# Altium PCB PCB_Ticketing_Master.PcbDoc
Units mm, origin at the board's own origin, x right, y up, seen from the top; angles counter-clockwise.
Board outline 167.28 x 106.75 mm, 2 copper layers (Top Layer, Bottom Layer), stack 1.586 mm thick; 76 components, 54 nets, 318 pads, 135 vias.
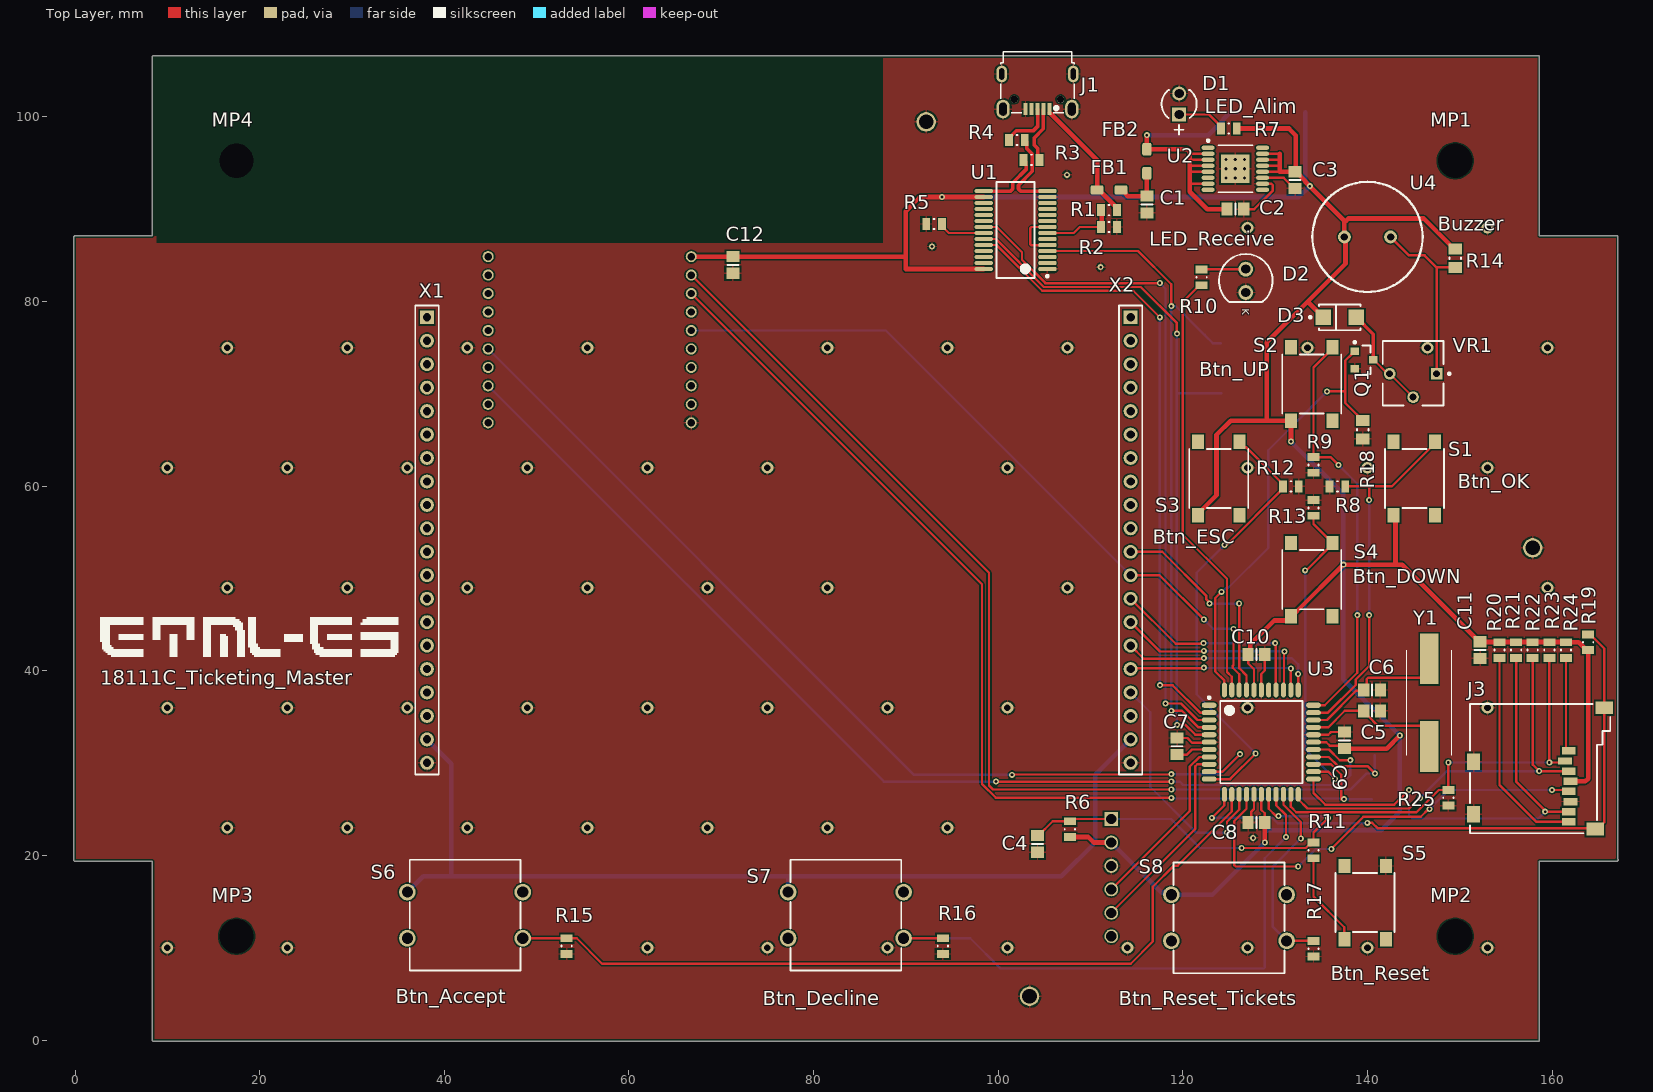
[diagram p0: Top Layer view]
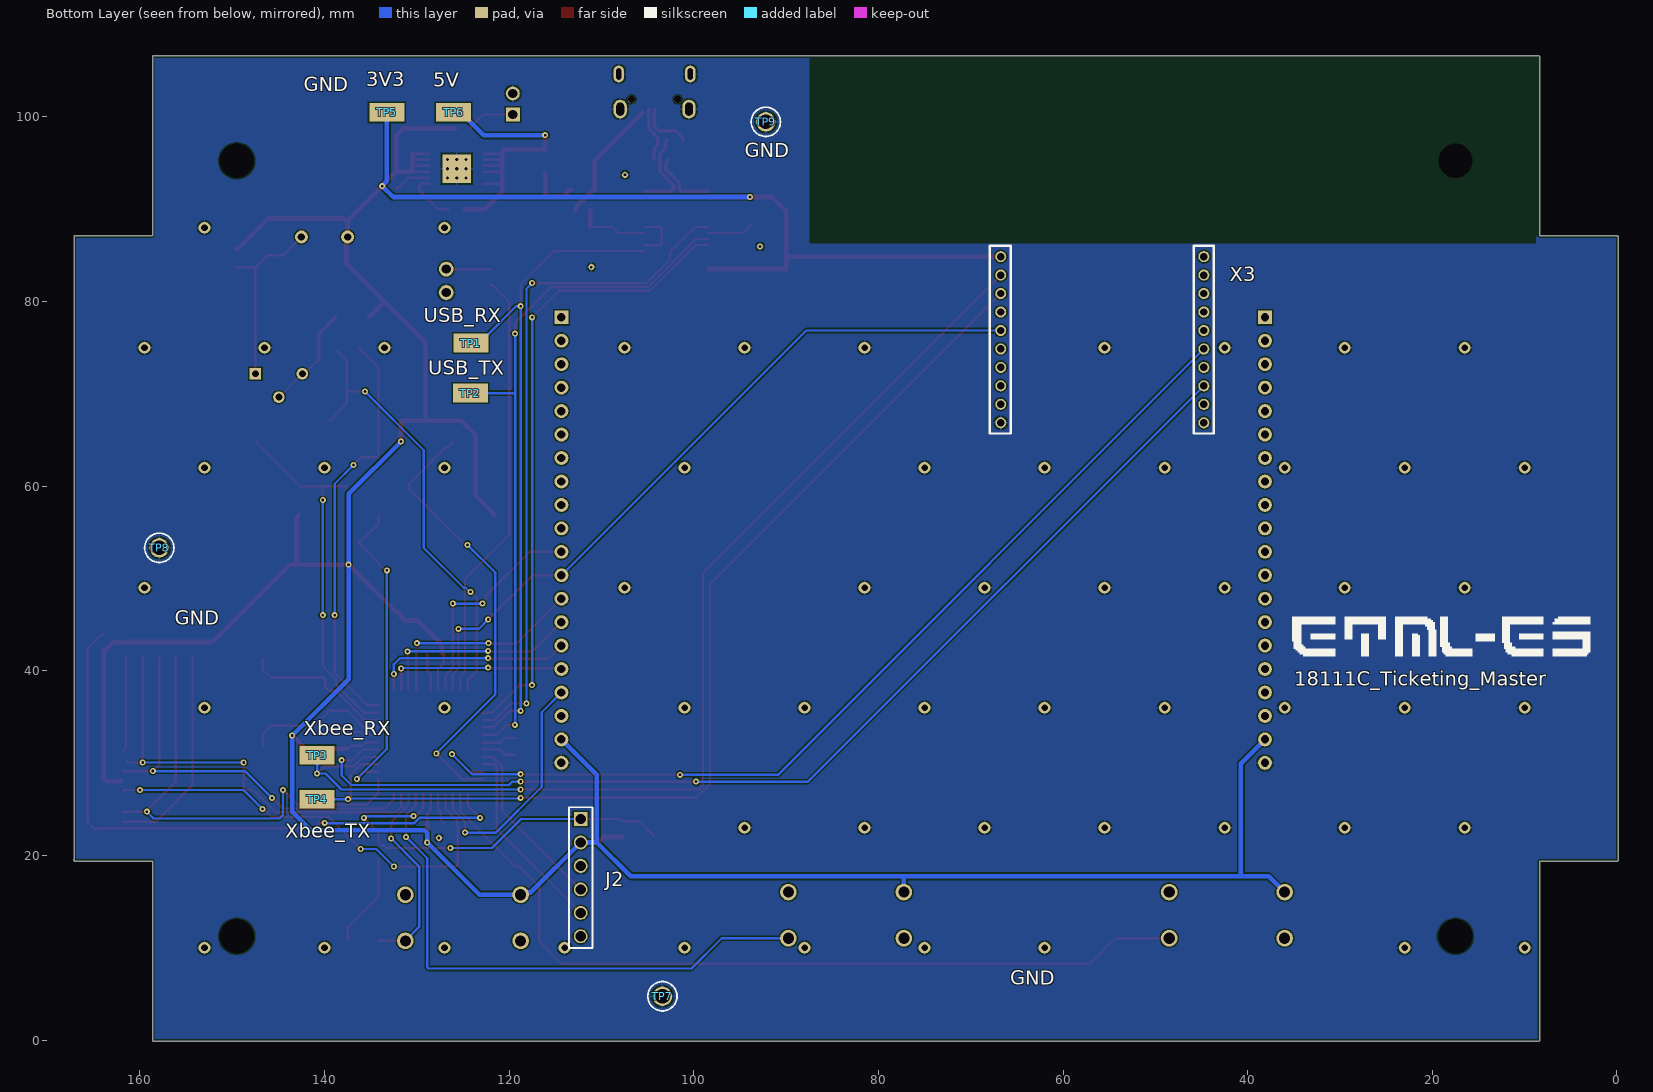
[diagram p1: Bottom Layer view, seen from below]

## Layer stack, top to bottom
Top Solder: solder mask 0.0102, Solder Resist, Dk 3.5
Top Layer: signal copper 0.018
Dielectric1: core 1.55, FR-4, Dk 4.8
Bottom Layer: signal copper 0.018
Bottom Solder: solder mask 0.0102, Solder Resist, Dk 3.5

## Board outline
8.373,0 8.373,19.373 0,19.373 cw(c0,19.5) -0.127,19.5 -0.127,87 cw(c0,87) 0,87.127 8.373,87.127 8.373,106.5 cw(c8.5,106.5) 8.5,106.627 158.5,106.627 cw(c158.5,106.5) 158.627,106.5 158.627,87.127 167,87.127 cw(c167,87) 167.127,87 167.127,19.601 cw(c167.025,19.525) 167.152,19.525 cw(c167.025,19.525) 167.115,19.435 167.09,19.41 cw(c167,19.5) 167,19.373 158.627,19.373 158.627,0 cw(c158.5,0) 158.5,-0.127 8.5,-0.127 cw(c8.5,0)

## Design rules (kind name [scope] priority, off if disabled: settings)
BoardOutlineClearance [All] p1: gap=0.25 ignorepadtopadclearanceinfootprint=FALSE except(0: Arc-SplitContinuation Track-SplitContinuation SMDPad-SplitContinuation THPad-SplitContinuation Via-SplitContinuation Fill-SplitContinuation Poly-SplitContinuation Region-SplitContinuation Text-SplitContinuation)
Clearance Clearance-xPP-xTP-xTT [All] p1: gap=0.15 ignorepadtopadclearanceinfootprint=FALSE except(0: Arc-Hole Track-Hole SMDPad-Hole THPad-Hole Via-Hole Fill-Hole Poly-Hole Region-Hole Text-Hole)
ComponentClearance [All] p1: gap=0.25 collisioncheckmode=3 verticalgap=0.25 showdistances=FALSE
DiffPairsRouting [All] p1: maxlimit=0.25 minlimit=0.25 mostfreqgap=0.25 toplayer_minwidth=0.381 toplayer_maxwidth=0.381 toplayer_prefwidth=0.381 bottomlayer_minwidth=0.381 bottomlayer_maxwidth=0.381 bottomlayer_prefwidth=0.381 maxuncoupledlength=12.5
Height [All] p1: minheight=0 maxheight=25 prefheight=12.5
HoleSize HoleSize-PTH [All] p1: absolutevalues=TRUE maxlimit=10 minlimit=0.25 maxpercent=80.000 minpercent=20.000
HoleToHoleClearance [All] p1: gap=0.35 allowstackedmicrovias=TRUE
MinimumAnnularRing "Minimum IAR  >0.45mm" [((ObjectKind = 'Pad') OR (ObjectKind = 'Via')) And (Layer = 'MultiLayer') And (HoleDiameter > AsMM(0.45))] p1: minimumring=0.175 // minimum inner annular ring for pads > 0.45mm finished hole size
MinimumAnnularRing "Minimum IAR <=0.45mm" [((ObjectKind = 'Pad') OR (ObjectKind = 'Via')) And (Layer = 'MultiLayer') And (HoleDiameter <= AsMM(0.45))] p2: minimumring=0.175 // minimum inner annular ring for pads <= 0.45mm finished hole size
MinimumSolderMaskSliver [All] p1: minsoldermaskwidth=0.08
PasteMaskExpansion [All] p1: expansion=-0.025
PlaneClearance PlaneClearance-IPI [All] p1: clearance=0.25
PlaneConnect [All] p1: planeconnectstyle=Relief reliefexpansion=0.175 reliefentries=4 reliefconductorwidth=0.2 reliefairgap=0.2
PolygonConnect PolygonConnect-xTW [All] p1: connectstyle=Relief reliefconductorwidth=0.2 reliefentries=4 polygonreliefangle="90 Angle" airgapwidth=0.2
RoutingCorners [All] p1: cornerstyle=45-Degree minsetback=2.5 maxsetback=2.5
RoutingVias RoutingViasES [All] p1: holewidth=0.3 width=0.65 viastyle="Through Hole" minholewidth=0.25 minwidth=0.61 maxholewidth=0.45 maxwidth=0.8 // finishet hole size <= 0.45mm
SilkToSilkClearance [All] p1: silktosilkclearance=0.2
SilkToSolderMaskClearance SilkscreenOverComponentPads [IsPad] p1: minsilkscreentomaskgap=0.2 clearancetoexposedcopper=TRUE
SolderMaskExpansion [All] p1: expansion=0 istentingtop=FALSE
UnRoutedNet [All] p1: checkbadconnections=TRUE
Width "Width Power" [InNetClass('POWER')] p1: maxlimit=1 minlimit=0.254 preferedwidth=0.5
Width Width-xTW [All] p2: maxlimit=1.5 minlimit=0.15 preferedwidth=0.2
17 further rules are at their usual default settings.

## Classes and differential pairs
net class POWER: 3V3 5V GND NetC1_1 NetR1_2 NetU2_6 VBUS
component class Designator: 1 2 3 4 D1 D2 D3 MP1 MP2 MP3 MP4 Q1 R7 R8 R9 R10 R12 R13 R14 R15 R16 R17 R18 S1 S2 S3 S4 S6 S7 S8 U4 VR1
differential pair USB_D: +USB_D_P -USB_D_N
differential pair U_D: +U_D_P -U_D_N

## Components (designator, comment, footprint, x,y, rotation, side; value= is the part's Value field where it differs from the comment)
C1 "680nF" 6-0805_N 116.1,90.516 r270 top
C2 "10uF" 6-0805_N 125.695,90.009 r0 top
C3 "10uF" 6-0805_N 132.164,93.159 r90 top
C4 "120nF" 6-0805_N 104.25,21.25 r90 top
C5 "22pF" 6-0805_N 140.5,35.669 r180 top
C6 "22pF" 6-0805_N 140.5,37.925 r180 top
C7 "10uF" 6-0805_N 119.387,31.825 r270 top
C8 "100nF" 6-0805_N 127.975,23.55 r0 top
C9 "100nF" 6-0805_N 137.491,32.469 r270 top
C10 "100nF" 6-0805_N 127.975,41.75 r180 top
C11 "1uF" 6-0805_N 152.2,42.25 r90 top
C12 "100nF" 6-0805_N 71.25,83.97 r90 top
D1 "WP424IDT" LED-2P-2.28-3MM 119.6,101.4 r90 top
D2 "WP7113SEC" "Type 5mm" 126.821,82.245 r270 top
D3 "SS14-E3/61T" FP-95400-MFG 137.005,78.295 r0 top
FB1 "600Ohm, 2A" "WE-CBF_0805_High Current" 112,92.1 r0 top
FB2 "600Ohm, 2A" "WE-CBF_0805_High Current" 116.1,95.2 r90 top
J1 "629105150521" 629105150521 104.25,103.75 r180 top
J2 "76384-406LF" 76384-406LF 112.25,23.948 r270 bottom
J3 "693071010811" 693071010811 158.7,29.4 r90 top
MP1 "M3" 9774010151 149.5,95.25 r0 top locked
MP2 "M3" 9774010151 149.5,11.25 r0 top locked
MP3 "M3" 9774010151 17.5,11.25 r0 top locked
MP4 "M3" 9774010151 17.5,95.25 r0 top locked
Q1 "IRLML2402TRPBF" INTR-IRLML2402TRPBF-3_V 139.63,73.689 r0 top
R1 "10k" RESC0805(2012)_L 112,89.9 r180 top
R2 "20k" RESC0805(2012)_L 112,88.075 r0 top
R3 "24R" RESC0805(2012)_L 103.607,95.359 r180 top
R4 "24R" RESC0805(2012)_L 102.033,97.5 r0 top
R5 "1k" RESC0805(2012)_L 93.05,88.4 r180 top
R6 "47k" RESC0805(2012)_L 107.75,22.85 r90 top
R7 "68" RESC0805(2012)_L 124.984,98.75 r0 top
R8 "10k" RESC0805(2012)_L 136.75,59.985 r180 top
R9 "10k" RESC0805(2012)_L 134.161,62.305 r270 top
R10 "68" RESC0805(2012)_L 122.034,82.625 r270 top
R11 "120" RESC0805(2012)_L 134.15,20.558 r90 top value=10k
R12 "10k" RESC0805(2012)_L 131.711,59.985 r0 top
R13 "10k" RESC0805(2012)_L 134.161,57.645 r90 top
R14 "1k" RESC2013X60X35ML10T20 149.5,84.7 r90 top
R15 "10k" RESC0805(2012)_L 53.25,10.185 r270 top
R16 "10k" RESC0805(2012)_L 94,10.185 r270 top
R17 "10k" RESC0805(2012)_L 134.15,9.9 r270 top
R18 "100k" RESC2013X60X35ML10T20 139.5,66.125 r90 top
R19 "10k" RESC0805(2012)_L 163.9,43.1 r270 top
R20 "10k" RESC0805(2012)_L 154.299,42.25 r90 top
R21 "10k" RESC0805(2012)_L 156.099,42.25 r90 top
R22 "10k" RESC0805(2012)_L 157.899,42.25 r90 top
R23 "10k" RESC0805(2012)_L 159.7,42.25 r90 top
R24 "10k" RESC0805(2012)_L 161.5,42.25 r90 top
R25 "1M" RESC0805(2012)_L 148.75,26.25 r90 top
S1 "430152095826" 430152095826 145.091,60.845 r90 top
S2 "430152095826" 430152095826 133.961,71.075 r90 top
S3 "430152095826" 430152095826 123.891,60.845 r90 top
S4 "430152095826" 430152095826 133.961,49.875 r90 top
S5 "430182050816" 430182050816 139.741,14.893 r270 top
S6 "430466073726" 4304x60737x6_12x12x7.3 42.251,13.535 r0 top
S7 "430466073726" 4304x60737x6_12x12x7.3 83.501,13.535 r0 top
S8 "430466073726" 4304x60737x6_12x12x7.3 125.001,13.25 r0 top
TP1 "" KSTN-5019_V 124.134,75.5 r180 bottom
TP2 "" KSTN-5019_V 124.195,70.086 r180 bottom
TP3 "" KSTN-5019_V 140.8,30.869 r180 bottom
TP4 "" KSTN-5019_V 140.8,26.1 r180 bottom
TP5 "" KSTN-5019_V 133.25,100.5 r180 bottom
TP6 "" KSTN-5019_V 126.021,100.5 r180 bottom
TP7 "" KSTN-5011_V 103.4,4.75 r180 bottom
TP8 "" KSTN-5011_V 157.899,53.324 r270 bottom
TP9 "" KSTN-5011_V 92.2,99.469 r180 bottom
U1 "CY7C64225-28PVXC" CYP-PVX28_N 101.883,87.75 r180 top
U2 "MAX1793EUE33+" TSOP65P640X110_HS-17N 125.684,94.384 r0 top
U3 "PIC32MX170F256D" MCHP-TQFP-PT44_N 128.5,32.275 r0 top
U4 "PS1240P02BT" Buzzer 140,87 r0 top
VR1 "0-10k" BOUR-3362P 144.948,72.219 r180 top
X1 "HEADER-1X20ROUND" HDR1X20 38.131,78.295 r270 top
X2 "HEADER-1X20ROUND" HDR1X20 114.341,78.295 r270 top
X3 "Header 2x10" ZB-SB 55.75,75.87 r180 bottom
Y1 "LFXTAL003151" LFXTAL003151REEL 146.691,36.55 r90 top

## Footprints (in the part's own frame and the unit in brackets; to place one, negate y for a bottom-side part, rotate by r counter-clockwise, add the part's x,y. Pads: shape width x height; smd on the part's side, far side on the other; paste and mask are expansions set on the pad)
6-0805_N [mm] "Chip Resistor, Body 2.0x1.2mm, IPC Medium Density"
  rect 1.2x1.4 smd: 1(-0.9,0) 2(0.9,0)
  silkscreen extent 0,-0.6 0,0.6, body extent -1.07,-0.7 1.07,0.7, height 0.7
4304x60737x6_12x12x7.3 [mm] "12x12mm washable Tact Switch, THT version"
  round 1.8 hole 1.2: 1(-6.25,2.5) 2(6.25,2.5) 3(-6.25,-2.5) 4(6.25,-2.5)
  silkscreen extent -6,-6 6,6, body extent -6.99,-6 6.99,6, height 7.35
76384-406LF [mm] "Connector; Header; 6 Position"
  rect 1.5x1.5 hole 1.1: 1(0,0)
  round 1.5 hole 1.1: 2(2.54,0) 3(5.08,0) 4(7.62,0) 5(10.16,0) 6(12.7,0)
  silkscreen extent -1.27,-1.27 13.97,1.27, body extent -0.72,-2.58 13.52,2.67, height 8.84
9774010151 [mm] "M2.5 Thread Internal, Length 1mm"
  round 0 hole 3.7 unplated paste-403.566: 1(0,0)
430152095826 [mm] "SMD Tact Switch, body 6x6mm"
  rect 1.55x1.3 smd: 1(-3.975,2.25) 2(-3.975,-2.25) 3(3.975,2.25) 4(3.975,-2.25)
  silkscreen extent -3.2,-3.2 3.2,3.2, body extent -4.5,-3.1 4.5,3.1, height 9.53
430182050816 [mm] "SMD Tact Switch, body 6x6mm"
  rect 1.55x1.3 smd: 1(-3.975,2.25) 2(-3.975,-2.25) 3(3.975,2.25) 4(3.975,-2.25)
  silkscreen extent -3.2,-3.2 3.2,3.2, body extent -4.5,-3.1 4.5,3.1, height 5.03
629105150521 [mm] "Micro USB 2.0 SMT Type B Horizontal 5 Contacts High Current"
  rect 0.45x1.3 smd: 1(-1.3,2.9) 2(-0.65,2.9) 3(0,2.9) 4(0.65,2.9) 5(1.3,2.9)
  oval 1.15x1.8 hole 0.55 slot 1.2 at 90 deg: Shell(-3.875,-0.9) Shell(3.875,-0.9)
  oval 1.45x2 hole 0.85 slot 1.4 at 90 deg: Shell(-3.725,2.9) Shell(3.725,2.9)
  round 0.8 hole 0.8 unplated: ""(-2.5,1.85) ""(2.5,1.85)
  silkscreen extent -4,-3.3 4,3.3, body extent -4,-3.3 4,3.3, height 2.71
693071010811 [mm] "Micro SD Card Connector, Push & Push"
  rect 0.8x1.5 smd: 1(1.94,-3.1) 2(0.84,-2.7) 3(-0.26,-3.1) 4(-1.36,-3.3) 5(-2.46,-3.1) 6(-3.56,-3.3) 7(-4.66,-3.1) 8(-5.76,-3.1)
  rect 1.4x1.9 smd: 9(-6.55,-5.95) 9(6.6,-6.95)
  rect 1.8x1.4 smd: 10(-4.95,7.2) 10(0.75,7.2)
  silkscreen extent -7,-7.6 7,7.6, body extent -7,-7.61 7,7.6, height 1.85
BOUR-3362P [mm] "THD, 3-Leads, Body 6.6x6.99mm, Pitch 2.54mm"
  rect 1.25x1.25 hole 0.75: 1(-2.54,0.035)
  round 1.25 hole 0.75: 2(0,2.575) 3(2.54,0.035)
  silkscreen extent -4.03,-3.49 3.3,3.5, body extent -3.3,-3.49 3.3,3.49, height 4.95
Buzzer [mm] "Buzzer d_12mm"
  round 1.4 hole 0.8: 1(-2.5,0) 2(2.5,0)
  silkscreen extent -5.97,-5.97 5.97,5.97, body extent -5.97,-5.71 5.97,5.71, height 6.5
CYP-PVX28_N [mm] "SOP, 28-Leads, Body 10.2x5.3mm, Pitch 0.65mm, IPC Medium Density"
  oval 2x0.45 smd: 1(-3.45,4.225) 2(-3.45,3.575) 3(-3.45,2.925) 4(-3.45,2.275) 5(-3.45,1.625) 6(-3.45,0.975) 7(-3.45,0.325) 8(-3.45,-0.325) 9(-3.45,-0.975) 10(-3.45,-1.625) 11(-3.45,-2.275) 12(-3.45,-2.925) 13(-3.45,-3.575) 14(-3.45,-4.225) 15(3.45,-4.225) 16(3.45,-3.575) 17(3.45,-2.925) 18(3.45,-2.275) 19(3.45,-1.625) 20(3.45,-0.975) 21(3.45,-0.325) 22(3.45,0.325) 23(3.45,0.975) 24(3.45,1.625) 25(3.45,2.275) 26(3.45,2.925) 27(3.45,3.575) 28(3.45,4.225)
  silkscreen extent -3.58,-5.2 2.05,5.2, body extent -3,-4.95 3,4.95, height 1.75
FP-95400-MFG [mm]
  rect 1.7x1.68 smd paste+0 mask+0: 1(-1.79,0) 2(1.79,0)
  silkscreen extent -3.32,-1.4 2.25,1.4, body extent -2.74,-1.5 2.74,1.5, height 0.25
HDR1X20 [mm] "Connector; Header; 20 Position"
  rect 1.5x1.5 hole 0.9: 1(0,0)
  round 1.5 hole 0.9: 2(2.54,0) 3(5.08,0) 4(7.62,0) 5(10.16,0) 6(12.7,0) 7(15.24,0) 8(17.78,0) 9(20.32,0) 10(22.86,0) 11(25.4,0) 12(27.94,0) 13(30.48,0) 14(33.02,0) 15(35.56,0) 16(38.1,0) 17(40.64,0) 18(43.18,0) 19(45.72,0) 20(48.26,0)
  silkscreen extent -1.27,-1.27 49.53,1.27
INTR-IRLML2402TRPBF-3_V [mm] "SOT23, 3-Leads, Body 3.05x1.4mm, Pitch 0.95mm"
  rect 0.9x0.8 smd: 1(-1,0.95) 2(-1,-0.95) 3(1,0)
  silkscreen extent -1.12,-1.55 0.7,2.02, body extent -0.7,-1.52 0.7,1.53, height 1.11
KSTN-5011_V [mm] "Test Point, Dia 3.17mm"
  round 2.1 hole 1.6: 1(0,0)
  silkscreen extent -1.59,-1.58 1.59,1.58, body extent -1.59,-1.59 1.59,1.59, height 8.13
KSTN-5019_V [mm] "Test Point, 1-Leads, Body 3.81x2.03mm"
  rect 3.8x2.03 smd: 1(0,0)
  body extent -1.91,-1.02 1.9,1.02, height 2.29
LED-2P-2.28-3MM [mm] "LED, 2-Leads, Dia 3mm, Pitch 2.28mm"
  rect 1.5x1.5 hole 1: 1(-1.14,0)
  round 1.5 hole 1: 2(1.14,0)
  silkscreen extent -3.29,-1.9 1.52,1.9, body extent -1.9,-1.91 1.52,1.91, height 5.3
LFXTAL003151REEL [mm]
  rect 5.5x2 smd: 1(-4.75,0) 2(4.75,0)
  silkscreen extent -5.7,-2.45 5.7,2.45, body extent -5.81,-2.35 5.8,2.35, height 4.2
MCHP-TQFP-PT44_N [mm] "QFN, 44-Leads, Body 10x10mm, Pitch 0.8mm, IPC Medium Density"
  oval 1.6x0.55 smd: 1(-5.65,4) 2(-5.65,3.2) 3(-5.65,2.4) 4(-5.65,1.6) 5(-5.65,0.8) 6(-5.65,0) 7(-5.65,-0.8) 8(-5.65,-1.6) 9(-5.65,-2.4) 10(-5.65,-3.2) 11(-5.65,-4) 23(5.65,-4) 24(5.65,-3.2) 25(5.65,-2.4) 26(5.65,-1.6) 27(5.65,-0.8) 28(5.65,0) 29(5.65,0.8) 30(5.65,1.6) 31(5.65,2.4) 32(5.65,3.2) 33(5.65,4)
  oval 0.55x1.6 smd: 12(-4,-5.65) 13(-3.2,-5.65) 14(-2.4,-5.65) 15(-1.6,-5.65) 16(-0.8,-5.65) 17(0,-5.65) 18(0.8,-5.65) 19(1.6,-5.65) 20(2.4,-5.65) 21(3.2,-5.65) 22(4,-5.65) 34(4,5.65) 35(3.2,5.65) 36(2.4,5.65) 37(1.6,5.65) 38(0.8,5.65) 39(0,5.65) 40(-0.8,5.65) 41(-1.6,5.65) 42(-2.4,5.65) 43(-3.2,5.65) 44(-4,5.65)
  silkscreen extent -5.77,-4.45 4.45,4.95, body extent -5,-5 5,5, height 1.2
RESC0805(2012)_L [mm] "Chip Resistor, Body 2.0x1.3mm, IPC High Density"
  rect 0.85x1.3 smd: 1(-0.85,0) 2(0.85,0)
  silkscreen extent -0.05,-0.55 0.05,0.55, body extent -1.1,-0.67 1.1,0.68, height 0.7
RESC2013X60X35ML10T20 [mm] "Chip Resistor, 2-Leads, Body 2.1x1.35mm, IPC Low Density"
  rect 1.2x1.45 smd: 1(-1,0) 2(1,0)
  silkscreen extent -0.1,-0.63 0.1,0.63, body extent -1.05,-0.68 1.05,0.67, height 0.6
TSOP65P640X110_HS-17N [mm] "TSOP, 16-Leads, Body 5.00x4.40mm, Pitch 0.65mm, Thermal Pad 3.10x3.10mm, IPC Medium Density"
  oval 1.4x0.45 smd: 1(-2.95,2.275) 2(-2.95,1.625) 3(-2.95,0.975) 4(-2.95,0.325) 5(-2.95,-0.325) 6(-2.95,-0.975) 7(-2.95,-1.625) 8(-2.95,-2.275) 9(2.95,-2.275) 10(2.95,-1.625) 11(2.95,-0.975) 12(2.95,-0.325) 13(2.95,0.325) 14(2.95,0.975) 15(2.95,1.625) 16(2.95,2.275)
  rect 3.1x3.1 smd: 17(0,0)
  rect 3.1x3.1 smd far side: 17(0,0)
  silkscreen extent -3.07,-2.55 1.85,3.17, body extent -3.19,-2.55 3.19,2.55, height 1.1
"Type 5mm" [mm] "THT, LED-5mm, 2pin- Body 5.8mm"
  round 1.6 hole 1: 1(1.27,0) 2(-1.27,0)
  silkscreen extent -2.9,-2.9 2.29,2.9, body extent -2.9,-2.9 2.5,2.9, height 11.7
"WE-CBF_0805_High Current" [mm]
  rrect40% 1.4x1 smd: 1(-1.3,0) 2(1.3,0)
  body extent -1,-0.6 1,0.6, height 0.9
ZB-SB [mm] "Header"
  round 1.2 hole 0.8: 1(-11,9) 2(-11,7) 3(-11,5) 4(-11,3) 5(-11,1) 6(-11,-1) 7(-11,-3) 8(-11,-5) 9(-11,-7) 10(-11,-9) 11(11,9) 12(11,7) 13(11,5) 14(11,3) 15(11,1) 16(11,-1) 17(11,-3) 18(11,-5) 19(11,-7) 20(11,-9)
  silkscreen extent -12.19,-10.16 12.07,10.16, body extent -12.55,-10.34 12.45,30.66, height 7.5

## Part data
C1: library part 885012207098, "WCAP-CSGP General Purpose Ceramic Capacitors, size 0805, 100nF, +/-10%, 50VDC", Supplier Part Number=732-7663-1-ND, Capacitance=680nF, Supplier=Digi-Key, Supplier Part Number 1=732-7663-1-ND, Supplier unit price=0.13, Technical Reference=X7R0805104K050DFCT10000
C2 C3 C7: library part Cap, "Capacitor", Supplier Part Number=1276-1298-1-ND, Supplier=Digi-Key, Supplier unit price=0.1
  C2 C3: Capacitance=10uF, LatestRevisionDate=17-Jul-2002, LatestRevisionNote="Re-released for DXP Platform.", PackageDescription="Radial Cap, Thru-Hole; 2 Leads; 0.3 in Pin Spacing", PackageReference=RAD-0.3, Published=8-Jun-2000, Publisher="Altium Limited"
C4: library part Cap, "Capacitor", Supplier Part Number=311-4323-1-ND, Supplier=Digi-Key, Supplier unit price=0.18
C5 C6: library part CMP-2007-03167-1, "VJ0805Y104KNAAT", Supplier Part Number=399-C0805C220J5GAC7800CT-ND, Supplier=Digi-Key, Supplier unit price=0.1
C8 C9 C10 C12: library part Cap, "Capacitor", Supplier Part Number=399-C0805C104M5RAC7800CT-ND, Supplier=Digi-Key, Supplier unit price=0.1
C11: library part Cap, "Capacitor", Supplier Part Number=1276-2931-1-ND, LatestRevisionDate=17-Jul-2002, LatestRevisionNote="Re-released for DXP Platform.", PackageDescription="Radial Cap, Thru-Hole; 2 Leads; 0.3 in Pin Spacing", PackageReference=RAD-0.3, Published=8-Jun-2000, Publisher="Altium Limited", Supplier=Digi-Key, Supplier unit price=0.1
D1: library part LED, "LED", Color=Red, Supplier Part Number=754-1305-ND, Supplier=Digi-Key, Supplier unit price=0.4
D2: library part LED, "LED", Color=Orange, Supplier Part Number=754-1271-ND, Supplier=Digi-Key, Supplier A Ref=754-1271-ND, Supplier unit price=0.4
D3: library part CMP-02539-000035-1, "DIODE SCHOTTKY 40V 1A DO214AC", Forward Current=1A, Manufacturer=Vishay, Max Junction Temp=+150°C, Max Repetitive Reverse Voltage=40V, Max Surge Forward Current=40A, Package=95400, Peak Reverse Current=0.2mA, Supplier Part Number=SS14-E3/61TGICT-ND, Temperature="-65°C to +150°C", Temperature Range Low=-65°C, Automotive=No, Category=Diode, ComponentLink2Description=Datasheet, ComponentLink2URL=http://www.vishay.com/docs/88746/ss12.pdf, Device Class L1="Discrete Semiconductors", Device Class L2=Diodes, Device Class L3="Schottky Diodes", Digikey Description="DIODE SCHOTTKY 40V 1A DO214AC", Footprint Url=http://www.vishay.com/docs/95400/sma.pdf, Height=2.29mm, Lead Free=Yes, Manufacturer Part Number=SS14-E3/61T, Mouser Description="SS14 Series 40 V 1 A Surface Mount Schottky Barrier Rectifier - DO-214AC (SMA)", Octopart=https://octopart.com/ss14-e3%2F61t-vishay-39552847, RoHS=TRUE, Standoff Height=0mm, Supplier=Digi-Key, Supplier unit price=0.48, Temperature Range High=+150°C
FB1 FB2: library part 742792040, "WE-CBF SMT EMI Suppression Ferrite Bead, size 0805, 600Ohm, 2A", DC Resistance max.=0.15Ohm, Operating Temperature="-55 to +125degC", Rated Current=2A, Supplier Part Number=732-1620-1-ND, ComponentLink1Description=Manufacturer, ComponentLink1URL=http://www.we-online.de, ComponentLink2Description=Datasheet, ComponentLink2URL=https://katalog.we-online.com/pbs/datasheet/742792040.pdf, Impedance max.=700Ohm, Impedance@100 MHz=600Ohm, Mounting Technology=SMT, Packaging="Tape and Reel", Part Number=742792040, Published Date="March 2019", Publisher="Wurth Elektronik", Size=0805, Supplier=Digi-Key, Supplier Part Number 1=732-1620-1-ND, Supplier unit price=0.22, Type="High Current"
J1: "Micro USB 2.0 SMT Type B Horizontal 5 Contacts High Current WR-COM", Part Number=732-5960-1-ND, ComponentLink1Description=Manufacturer, ComponentLink1URL=http://www.we-online.de, ComponentLink2Description=Datasheet, ComponentLink2URL=http://katalog.we-online.de/em/datasheet/629105150521.pdf, Construction=SMT, Gender=Receptacle, Interface Type="Type B", Published Date="April 2017", Publisher="Wurth Elektronik", Sub-Family="Micro USB 2.0", Supplier=Digi-key, Supplier Part Number=732-5960-1-ND, Supplier unit price=2.12, Type=Horizontal
J2: library part "Header 6", "Header, 6-Pin", Supplier Part Number 1=609-1321-ND, LatestRevisionDate=17-Jul-2002, LatestRevisionNote="Re-released for DXP Platform.", Publisher="Altium Limited", Supplier 1=Digi-Key, Supplier unit price=0.66
J3: "WR-CRD Micro SD Card Connector, Push & Push, with card detection", Operating Temperature="-25 to 85 degC", Part Number=732-3819-1-ND, Rated Current=0.5A, Working Voltage="500V AC", ComponentLink1Description=Manufacturer, ComponentLink1URL=http://www.we-online.de, ComponentLink2Description=Datasheet, ComponentLink2URL=http://katalog.we-online.de/em/datasheet/693071010811.pdf, Mounting Technology=SMT, Published Date="Feb. 2018", Publisher="Wurth Elektronik", Supplier=Digi-Key, Supplier Part Number=732-3819-1-ND, Supplier unit price=2.99
MP1 MP2 MP3 MP4: library part 9774010151, "WA-SMSI SMT Steel Spacer, M2.5 Thread Internal, Length 1mm", Supplier=Digi-Key
Q1: library part CMP-2000-05155-1, "HEXFET(R) Power MOSFET, N-Channel, 20 V, 1.2 A, 3-Pin SOT-23, RoHS, Tape and Reel", Manufacturer="Infineon Technologies", PackageCase=SOT-23, PartNumber=IRLML2402TRBF, Supplier Part Number=IRLML2402PBFCT-ND, Supplier=Digi-key, Supplier PN=IRLML2402PBFCT-ND, Supplier unit price=0.41
R1 R8 R9 R12 R13 R15 R16 R17 R19 R20 R21 R22 R23 R24: library part CMP-1013-00122-1, "100K 0.125W 5% 0805 (2012 Metric)  SMD", Case-EIA=0805, Case-Metric=2012, Power="0.125 W", Supplier Part Number=311-10KLGCT-ND, Tolerance="5 %", Supplier=Digi-Key, Supplier unit price=0.1, Technology=SMT
R2: library part CMP-1013-00122-1, "100K 0.125W 5% 0805 (2012 Metric)  SMD", Case-EIA=0805, Case-Metric=2012, Power="0.125 W", Supplier Part Number=RNCP0805FTD20K0CT-ND, Tolerance="5 %", Supplier=Digi-Key, Supplier unit price=0.1, Technology=SMT
R3 R4: library part CMP-1013-00122-1, "100K 0.125W 5% 0805 (2012 Metric)  SMD", Case-EIA=0805, Case-Metric=2012, Power="0.125 W", Supplier Part Number=311-24.0CRCT-ND, Tolerance="5 %", Supplier=Digi-Key, Supplier unit price=0.1, Technology=SMT
R5: library part CMP-1013-00122-1, "100K 0.125W 5% 0805 (2012 Metric)  SMD", Case-EIA=0805, Case-Metric=2012, Power="0.125 W", Supplier Part Number=RNCP0805FTD1K00CT-ND, Tolerance="5 %", Supplier=Digi-Key, Supplier unit price=0.1, Technology=SMT
R6: library part CMP-1013-00122-1, "100K 0.125W 5% 0805 (2012 Metric)  SMD", Supplier Part Number=A130144CT-ND, Supplier=Digi-Key, Supplier unit price=0.1
R7: library part CMP-1013-00122-1, "100K 0.125W 5% 0805 (2012 Metric)  SMD", Supplier Part Number=RMCF0805JT68R0CT-ND, Supplier=Digi-Key, Supplier unit price=0.1
R10: library part CMP-1013-00122-1, "100K 0.125W 5% 0805 (2012 Metric)  SMD", Case-EIA=0805, Case-Metric=2012, Power="0.125 W", Supplier Part Number="RMCF0805JT68R0C  T-ND", Tolerance="5 %", Supplier=Digi-Key, Supplier unit price=0.1, Technology=SMT
R11: library part CMP-1013-00122-1, "100K 0.125W 5% 0805 (2012 Metric)  SMD", Supplier Part Number=A129738CT-ND, Supplier=Digi-Key, Supplier unit price=0.1
R14: library part CMP-2100-03671-1, "Chip Resistor, 1 KOhm, +/- 1%, 125 mW, -55 to 155 degC, 0805 (2012 Metric), RoHS, Tape and Reel", PackageCase=0805, Supplier Part Number=YAG3703CT-ND, Voltage Rating=150V, Supplier=Digi-Key, Supplier unit price=0.1
R18: library part CMP-2100-03671-1, "Chip Resistor, 100 KOhm, +/- 1%, 125 mW, -55 to 155 degC, 0805 (2012 Metric), RoHS, Tape and Reel", PackageCase=0805, Supplier Part Number=YAG3688CT-ND, Voltage Rating=150V, Supplier=Digi-Key, Supplier unit price=0.1
R25: library part CMP-1013-00122-1, "100K 0.125W 5% 0805 (2012 Metric)  SMD", Case-EIA=0805, Case-Metric=2012, Power="0.125 W", Supplier Part Number=YAG3704CT-ND, Tolerance="5 %", Supplier=Digi-Key, Supplier unit price=0.1, Technology=SMT
S1 S2 S3 S4: "6x6mm SMD Tact Switch WS-TASV, height 9.5 mm, 260 gf", Operating Temperature="-40 to +85 degC", Part Number=732-6999-1-ND, Rated Current="50 mA", Rated Voltage="12 VDC", ComponentLink1Description=Manufacturer, ComponentLink1URL=http://www.we-online.de, ComponentLink2Description=Datasheet, ComponentLink2URL=http://katalog.we-online.de/em/datasheet/4301x2xxx8x6.pdf, Life Cycle=200000, Operation Force="260 gf", Published Date="Nov. 2017", Publisher="Wurth Elektronik", Size="6x6x9.5 mm", Supplier=Digi-Key, Supplier Part Number=732-6999-1-ND, Supplier unit price=0.51
S5: "6x6mm SMD Tact Switch WS-TASV, height 5 mm, 160 gf", Supplier Part Number=732-7005-1-ND, Supplier=Digi-Key, Supplier unit price=0.51
S6 S7 S8: "WS-TATV 12x12mm washable Tact Switch, THT version", Part Number=430466073726-ND, ComponentLink1Description=Manufacturer, ComponentLink1URL=http://www.we-online.de, ComponentLink2Description=Datasheet, ComponentLink2URL=http://katalog.we-online.de/em/datasheet/4304x60737x6.pdf, Life Cycle="300000 cycles", Operation Force=260g, Published Date="June 2017", Publisher="Wurth Elektronik", Size="12x12x7.3 mm", Supplier=Digi-Key, Supplier Part Number=430466073726-ND, Supplier unit price=0.56
TP1 TP2 TP3 TP4 TP5 TP6: library part CMP-1672-00008-1, "Test Point, 1 Position SMD, RoHS, Tape and Reel", Package Quantity=1000, Supplier Part Number=36-5019CT-ND, ComponentLink1Description="Manufacturer URL", ComponentLink1URL=http://www.keyelco.com/, ComponentLink2Description=Datasheet, ComponentLink2URL=http://www.keyelco.com/product-pdf.cfm?p=1357, Contact Plating=Silver, DatasheetVersion=03/2014, Mount="Surface Mount", Mounting Technology="Surface Mount", PackageDescription="1-Pin Surface Mount Device, Body 3.81 x 2.03 mm", PackageReference=5019, Packaging="Tape and Reel", Pins=1, RoHSCompliant=True, Supplier=Digi-Key
  TP1 TP2 TP5 TP6: Supplier unit price=0.33
TP7 TP8 TP9: library part CMP-1672-00003-4, "Test Point, Black, Through Hole, RoHS, Bulk,5011", Colour=Black, Manufacturer=Keystone, Package Quantity=100, ComponentLink1Description="Manufacturer URL", ComponentLink1URL=http://www.keyelco.com/, ComponentLink2Description=Datasheet, ComponentLink2URL=http://www.keyelco.com/product-pdf.cfm?p=1320, Contact Material=Bronze, Contact Plating=Silver, DatasheetVersion="Rev. F, 12/2013", Height="8.12 mm", Mount="Through Hole", Mounting Technology="Through Hole", PackageDescription="1-Pin Through Hole Device, Dia 3.17 mm", PackageReference=5011, Packaging=Bulk, Pins=1, REACH SVHC="No SVHC", RoHSCompliant=true
U1: library part CMP-0967-00143-1, "USB-to-UART Bridge Controller, 3 to 5.25 V, 0 to 70 degC, 28-Pin SSOP (PVX28), Tube", Manufacturer=Cypress, Max. Operating Temp. (degreesC)=70, Max. Operating Voltage (V)=5.25, Min. Operating Temp. (degreesC)=0, Min. Operating Voltage (V)=3, Part Number=428-3158-ND, ComponentLink1Description="Manufacturer URL", ComponentLink1URL=http://www.cypress.com/, ComponentLink2Description=Datasheet, ComponentLink2URL=http://www.cypress.com/?docID=48153, ComponentLink3Description="Package Specification", ComponentLink3URL=http://www.cypress.com/?docID=1371, DatasheetVersion="Rev. *D", Manufacturer Part Number=CY7C64225-28PVXC, Memory Architecture=Flash, Mounting Technology="Surface Mount", PackageDescription="28-Pin Super Small Outline Package, Body 10.2 x 5.3 mm, Pitch 0.65 mm", PackageReference=PVX28, PackageVersion="Rev. *C, 10/2001", Packing=Tube, PartNumber=CY7C64225-28PVXC, RoHS=Pb-Free, Supplier=Digi-key, Supplier Part Number=428-3158-ND, Supplier unit price=3.83
U2: library part MAX1793, Supplier Part Number=MAX1793EUE33+-ND, Supplier=Digi-Key, Supplier unit price=3.92
U3: library part MCHP-PIC32MX2XXFXXXD-TQFP-44, Supplier Part Number=PIC32MX170F256D-I/PT-ND, Supplier=Digi-Key, Supplier unit price=5.43
U4: library part BZR, "Buzzer 12mm piezo", Manufacturer="TDK Corporation", Supplier Part Number=445-2525-1-ND, Supplier=Digi-Key, Supplier unit price=0.6
VR1: library part CMP-1747-00003-1, "Square Trimpot(R) Trimming Potentiometer, 100 KOhm, 300 V, -55 to 125 degC, 3-Pin THD, RoHS, Tube", Case\Package=Axial, Max Operating Temperature="155 degC", Min Operating Temperature="-55 degC", Package Quantity=200, Part Number=3362P-103LF-ND, Power Rating="250 mW", Resistance=10k, Tolerance=1%, Voltage Rating="250 V", ComponentLink1Description="Manufacturer URL", ComponentLink1URL=http://www.bourns.com/, ComponentLink2Description=Datasheet, ComponentLink2URL=http://www.bourns.com/docs/Product-Datasheets/3362.pdf, DatasheetVersion=May-16, Length="0.248 inch", Mount="Through Hole", PackageDescription="3-Pin Through Hole Device, Body 6.6 x 6.99 mm, Pitch 2.54 mm", PackageReference=3326P, Packaging=Bulk, RoHSCompliant=true, Supplier=Digi-Key, Supplier Part Number=3362P-103LF-ND, Supplier unit price=0.99
X1: "Con_TFT_Gauche", Supplier=Digi-Key
X2: "Con_TFT_Droite", Supplier=Digi-Key
X3: library part "HDR ZB-SB 2x10_1", "Header 2x10 / Xbee de letml(1623) ou xbee XB24CAUIT-001", Supplier=Digi-Key
Y1: library part LFXTAL003151REEL, "Crystal or Oscillator", Frequency=8MHz, Supplier Part Number=9713794, Supplier=Farnell, Supplier unit price=0.392

## Via types
v1: diameter 0.65, hole 0.3, Top Layer to Bottom Layer, tented both sides, 62 vias
v2: diameter 1.27, hole 0.711, Top Layer to Bottom Layer, 57 vias
v3: diameter 0.75, hole 0.35, Top Layer to Bottom Layer, 9 vias
v4: diameter 0.65, hole 0.3, Top Layer to Bottom Layer, 7 vias

## Nets (pads, with @x,y where several pads share a name; then routed paths per layer and width w, separated by ;. In a path a pad name is that pad's centre, name@x,y a point inside that pad or via, vN(x,y) a via of type N, cw(c..) or ccw(c..) an arc to the next point about the centre after c; other vN are vias at no path point)
3V3: C3.2 C8.2 C9.2 C10.2 C11.2 C12.2 D3.1 J2.2 J3.4 R6.1 R7.2 R14.2 R19.2 R20.2 R21.2 R22.2 R23.2 R24.2 S1.1 S2.1 S3.1 S4.1 S6.1 S7.1 S8.1 TP5.1 U1.16 U1.28 U2.12 U2.13 U2.14 U2.15 U3.17 U3.28 U3.40 U4.1 X1.19 X2.19 X3.1 | length 469.3
  Top Layer w0.254: C10.2 127.075,40.795 127.7,40.17 U3.40 ; U3.17 128.5,24.942 128.875,24.567 C8.2 ; U2.12 130.5,94.059 ; U2.13 130.5,94.709 ; U2.14 130.5,95.359 ; U2.15 130.491,96.009 130.5,96 ; U3.28 135.532,32.275 135.928,31.879 137.181,31.879 C9.2
  Top Layer w0.5: X3.1 89.796,84.87 90,84.666 ; U1.28 90,83.525 90,84.666 ; U1.16 v1(93.9,91.325) 91.525,91.325 90,89.8 90,84.666 ; R6.1 109.755,22 110.347,21.408 J2.2 ; S3.1 121.641,56.995 123.65,59.004 123.65,65.581 125.169,67.1 129.109,67.1 ; R7.2 131.493,98.75 132.25,97.993 132.25,94.145 C3.2 130.5,94.059 130.5,94.709 130.5,95.359 130.5,96 ; C10.2 127.318,41.993 127.318,42.868 129.9,45.45 131.311,45.45 131.711,45.85 131.711,46.025 132.111,46.425 132.316,46.425 v1@137.362,51.471 ; v1(128.875,21.408) C8.2 ; v1(131.711,64.845) S2.1 129.109,67.1 ; C3.2@132.264,94.059 133.264,93.059 133.264,92.986 v1(133.75,92.5) 137.5,88.75 U4.1 ; D3.1 135.205,78.295 133.52,79.98 133.5,79.98 ; v1(137.391,51.5) 143.033,51.5 ; C9.2 142.069,31.569 v1(143.5,33) ; U4.1@137.619,87.125 137.619,84.099 133.5,79.98 ; 137.625,88.707 137.918,89 146.075,89 149.375,85.7 R14.2 ; S1.1 143.033,56.678 143.033,51.5 ; R24.2@161.426,43.125 152.225,43.125 C11.2 152.1,43.15 143.75,51.5 143.033,51.5 ; R24.2 162.9,43.1 163.5,42.5 163.5,42.425 163.675,42.25 R19.2 163.9,28.333 163.607,28.04 J3.4 ; 129.109,67.1 129.109,75.59 133.5,79.98
  Bottom Layer w0.5: S6.1 37.716,17.75 40.75,17.75 ; X1.19@38.155,32.551 40.75,29.956 40.75,17.75 ; S7.1 77.251,17.75 ; v1(93.9,91.325) 132.575,91.325 v1(133.75,92.5) 133.75,92.541 133.25,93.041 TP5.1 ; X2.19 110.5,28.734 110.5,21.408 ; v1(131.711,64.845) 137.391,59.165 v1(137.391,51.5) 137.391,39.109 v1(143.5,33) 143.5,24.74 141.495,22.735 129.168,22.735 128.875,22.442 v1(128.875,21.408) 123.217,15.75 S8.1 118.505,15.995 117.663,15.995 J2.2 110.5,21.408 ; 40.75,17.75 77.251,17.75 ; 77.251,17.75 106.842,17.75 110.5,21.408
5V: C2.1 FB2.2 TP6.1 U2.2 U2.3 U2.4 U2.5 U2.7 | length 36.4
  Top Layer w0.254: 120.75,92.759 U2.7 ; 120.75,94.059 U2.5 ; 120.75,94.709 U2.4 ; 120.75,95.359 U2.3 ; 120.75,96.243 120.75,96.084 120.825,96.009 U2.2
  Top Layer w0.5: v1(116.1,98.021) FB2.2 120.493,96.5 120.75,96.243 ; 120.75,96.084 120.75,95.359 120.75,94.709 120.75,94.059 120.75,92.759 120.75,91.884 122.625,90.009 C2.1
  Bottom Layer w0.5: v1(116.1,98.021) 116.121,98 122.75,98 124.371,99.621 124.371,99.735 125.136,100.5 TP6.1
BackLight: U3.41 X2.11 | length 24.1
  Top Layer w0.254: X2.11 117.765,52.895 122.547,48.112 122.547,47.742 122.898,47.392 v1(122.898,47.285) ; v1(126.1,47.285) 126.1,40.293 126.9,39.493 U3.41
  Bottom Layer w0.254: v1(122.898,47.285) v1(126.1,47.285)
Connect(M): U3.27 X3.18 | length 117.8
  Top Layer w0.254: v1(99.75,28) v1(118.751,28) ; U3.27 135.848,31.475 136.998,30.325 v1(138.141,30.325)
  Bottom Layer w0.254: X3.18 87.62,28 v1(99.75,28) ; v1(118.751,28) 119.656,28 120.015,27.641 137.109,27.641 138.141,28.672 v1(138.141,30.325)
CS: U3.36 X2.14 | length 22.3
  Top Layer w0.254: X2.14 117.516,42.1 122.201,42.1 v1(122.276,42.174) ; U3.36 130.95,37.975 130.95,42.05 v1(131,42.1)
  Bottom Layer w0.254: v1(122.276,42.174) 122.313,42.137 130.963,42.137 v1(131,42.1)
D/C: U3.37 X2.13 | length 22.8
  Top Layer w0.254: X2.13 119.23,42.926 122.176,42.926 v1(122.25,43) ; v1(130,43) 130.05,42.95 130.05,37.975 U3.37
  Bottom Layer w0.254: v1(122.25,43) v1(130,43)
GND: C1.2 C2.2 C3.1 C4.1 C5.1 C6.1 C7.1 C8.1 C9.1 C10.1 C11.1 C12.1 D1.2 D2.1 J1.5 J1.Shell J2.3 J3.6 J3.10 Q1.2 R2.2 R5.2 R8.2 R9.2 R12.2 R13.2 R15.2 R16.2 R17.2 R18.1 R25.1 S5.1 TP7.1 TP8.1 TP9.1 U1.1 U1.13 U2.10 U2.11 U2.17 U3.6 U3.16 U3.29 U3.39 X1.20 X2.20 X3.10 | length 24.2
  Top Layer w0.254: C7.1 120.494,32.725 121.001,32.218 122.793,32.218 U3.6 ; C2.2 127.719,90.009 129.75,92.04 129.75,92.6 129.591,92.759 U2.10 ; C8.1 127.425,23.9 127.425,24.748 127.7,25.023 U3.16 ; U3.39 128.5,39.665 128.875,40.04 C10.1 ; U2.11 130.914,93.409 132.064,92.259 C3.1 ; U3.29 135.751,33.075 136.046,33.369 C9.1
  other v1: 127.625,21.908 111.105,83.718 92.825,85.966 107.443,93.734
  other v2: 10,10 23,10 62,10 75,10 88,10 101,10 114,10 127,10 140,10 153,10 16.5,23 29.5,23 42.5,23 55.5,23 68.5,23 81.5,23 94.5,23 10,36 23,36 36,36 49,36 62,36 75,36 88,36 101,36 127,36 153,36 16.5,49 29.5,49 42.5,49 55.5,49 68.5,49 81.5,49 107.5,49 159.5,49 10,62 23,62 36,62 49,62 62,62 75,62 101,62 127,62 140,62 153,62 16.5,75 29.5,75 42.5,75 55.5,75 81.5,75 94.5,75 107.5,75 133.5,75 146.5,75 159.5,75 127,88 153,88
  other v3: 124.684,93.384 125.684,93.384 126.684,93.384 124.684,94.384 125.684,94.384 126.684,94.384 124.684,95.384 125.684,95.384 126.684,95.384
LED_Ques: R10.2 U3.43 | length 47
  Top Layer w0.254: R10.2@121.511,81.477 120,79.966 120,54.741 124.775,49.966 124.775,39.89 125.3,39.365 U3.43 ; R10.2@121.511,81.477 121.809,81.775 R10.2
LINK(M): U3.10 X3.16 | length 105.6
  Top Layer w0.254: v1(101.5,28.734) 101.533,28.767 118.718,28.767 v1(118.751,28.8) ; U3.10 124.299,29.075 v1(126.198,30.974)
  Bottom Layer w0.254: X3.16 90.886,28.734 v1(101.5,28.734) ; v1(118.751,28.8) 124.024,28.8 v1(126.198,30.974)
MISO: U3.35 X2.16 | length 19.8
  Top Layer w0.254: X2.16 114.414,40.268 122.203,40.268 v1(122.276,40.341) ; U3.35 v1(131.7,40.267)
  Bottom Layer w0.254: v1(122.276,40.341) 122.313,40.304 131.663,40.304 v1(131.7,40.267)
MOSI: U3.34 X2.15 | length 21.8
  Top Layer w0.254: X2.15 115.776,41.3 122.201,41.3 v1(122.276,41.374) ; U3.34 v1(132.5,39.665)
  Bottom Layer w0.254: v1(122.276,41.374) 131.828,41.374 132.5,40.702 v1(132.5,39.665)
NetC1_1: C1.1 FB1.2 FB2.1 | length 5.7
  Top Layer w0.5: FB1.2 113.5,92.1 113.75,91.85 113.75,91.709 114.043,91.416 C1.1 FB2.1
NetC5_2: C5.2 U3.30 Y1.1 | length 15.8
  Top Layer w0.254: U3.30 135.751,33.875 137.546,35.669 C5.2 139.6,35.569 140.073,35.096 141.1,34.069 145.818,34.069 146.691,33.196 Y1.1
NetC6_2: C6.2 U3.31 Y1.2 | length 16.5
  Top Layer w0.254: U3.31 135.601,34.675 138.768,37.842 139.517,37.842 139.913,38.238 139.913,39.101 140.062,39.25 145.818,39.25 146.691,40.123 Y1.2
NetC7_2: C7.2 U3.7 | length 3.7
  Top Layer w0.254: C7.2 120.441,30.925 120.991,31.475 U3.7
NetD1_1: D1.1 R7.1 | length 5.3
  Top Layer w0.254: D1.1 122.849,100.26 124.134,98.975 R7.1
NetD2_2: D2.2 R10.1 | length 4.8
  Top Layer w0.254: R10.1 122.074,83.515 D2.2
NetD3_2: D3.2 Q1.3 VR1.2 VR1.3 | length 11.4
  Top Layer w0.254: Q1.3 140.68,73.689 142.185,72.184 VR1.3 VR1.2
  Top Layer w0.381: D3.2 138.805,78.295 140.63,76.47 Q1.3
NetJ3_1: J3.1 R24.1 | length 10.2
  Top Layer w0.254: R24.1 161.5,31.613 161.773,31.34 J3.1
NetJ3_2: J3.2 R23.1 R25.2 U3.21 | length 46.7
  Top Layer w0.254: U3.21 131.7,25.271 132.293,24.678 145.297,24.678 147.719,27.1 R25.2 v1(148.75,30.069) ; R23.1 v1(159.7,30.069) 161.229,30.069 J3.2
  Bottom Layer w0.254: v1(148.75,30.069) v1(159.7,30.069)
NetJ3_3: J3.3 R22.1 U3.22 | length 44.5
  Top Layer w0.254: U3.22 132.5,26.1 133.518,25.082 144.5,25.082 145.645,26.227 v1(145.691,26.227) ; R22.1 157.899,29.84 v1(158.6,29.14) J3.3
  Bottom Layer w0.254: v1(145.691,26.227) 148.604,29.14 v1(158.6,29.14)
NetJ3_5: J3.5 U3.15 | length 48
  Top Layer w0.254: U3.15 126.9,25.067 125.575,23.742 125.575,18.959 125.724,18.81 v4(132.5,18.81) ; v4(136.078,20.706) 139.56,24.188 145.771,24.188 146.606,25.023 v1(146.714,25.023) ; v1(160,27.1) 161.64,27.1 J3.5
  Bottom Layer w0.254: v4(132.5,18.81) 134.396,20.706 v4(136.078,20.706) ; v1(146.714,25.023) 148.791,27.1 v1(160,27.1)
NetJ3_7: J3.7 R21.1 U3.23 | length 51.5
  Top Layer w0.254: U3.23 134.15,26.775 135.439,25.486 142.886,25.486 v1(144.5,27.1) ; R21.1 156.099,28.001 159.06,25.04 159.06,25.037 v1@159.357,24.74 ; v1(159.25,24.74) J3.7
  Bottom Layer w0.254: v1(144.5,27.1) 144.5,24.379 144.879,24 158.51,24 v1(159.25,24.74)
NetJ3_8: J3.8 R20.1 | length 22.9
  Top Layer w0.254: R20.1 154.299,27.641 158.299,23.64 J3.8
NetJ3_9: J3.9 R19.1 U3.12 | length 67.7
  Top Layer w0.254: v1(123.132,24.076) 124.5,25.444 U3.12 ; v1(139.985,23.538) 140.502,23.538 141.077,22.963 164.537,22.963 164.65,22.85 164.9,22.85 165.65,23.6 165.65,36 165.65,42.425 164.125,43.95 R19.1
  Bottom Layer w0.254: v1(123.132,24.076) 129.714,24.076 130.316,23.474 139.921,23.474 v1(139.985,23.538)
NetQ1_1: Q1.1 R18.2 U3.44 | length 48.8
  Top Layer w0.254: v1(124.173,48.565) 123.5,47.892 123.5,39.945 124.5,38.945 U3.44 ; v1(135.626,70.269) 137.6,70.269 ; Q1.1 138.58,74.639 138.307,74.366 138.307,74.316 137.6,73.609 137.6,70.269 ; R18.2 139.375,67.125 138.902,67.598 138.902,67.723 137.6,69.025 137.6,70.269
  Bottom Layer w0.254: v1(124.173,48.565) 124.28,48.565 124.706,48.991 124.926,48.991 129.25,53.315 129.25,63.895 v1@135.624,70.269
NetR1_2: R1.2 R2.1 U1.7 | length 8
  Top Layer w0.254: U1.7 108.181,87.425 108.831,88.075 R2.1
  Top Layer w0.5: R1.2 111.205,89.845 111.205,88.13 R2.1@111.26,88.075
NetR5_1: R5.1 U1.22 | length 5.1
  Top Layer w0.254: R5.1 93.9,88.175 94.65,87.425 U1.22
NetR8_1: R8.1 S1.4 U3.32 | length 39.7
  Top Layer w0.254: U3.32 135.716,35.475 138.723,38.482 138.723,39.052 140.18,40.508 v1(140.18,46.025) ; R8.1 138.69,59.985 140.18,59.985 ; v1(140.18,58.495) 140.18,59.985 ; S1.4 147.341,64.695 142.63,59.985 140.18,59.985
  Bottom Layer w0.254: v1(140.18,46.025) v1(140.18,58.495)
NetR9_1: R9.1 S2.4 U3.33 | length 45.4
  Top Layer w0.254: U3.33 135.375,36.275 138.902,39.802 v1(138.902,46.025) ; S2.4 136.211,74.925 134.161,72.875 R9.1 136.011,63.155 v1(136.861,62.305)
  Bottom Layer w0.254: v1(136.861,62.305) 138.902,60.264 v1(138.902,46.025)
NetR11_1: R11.1 S5.4 | length 10.2
  Top Layer w0.254: R11.1 134.15,15.572 137.491,12.232 S5.4
NetR12_1: R12.1 S3.4 U3.11 | length 48.7
  Top Layer w0.254: U3.11 125.119,28.275 v1(127.894,31.05) ; v1(124.5,53.645) 124.576,53.721 124.822,53.721 130.861,59.76 130.861,60.21 126.835,64.235 126.6,64.235 126.141,64.695 S3.4
  Bottom Layer w0.254: v1(124.5,53.645) 121.5,50.645 121.5,37.444 v1(127.894,31.05)
NetR13_1: R13.1 S4.4 U3.24 | length 34.8
  Top Layer w0.254: v1(133.25,50.885) 133.326,50.961 133.447,50.961 136.211,53.725 S4.4@136.211,53.846 ; U3.24 135.769,29.075 136.5,28.344 v1(136.5,28.275) ; R13.1 134.161,55.9 135.626,54.434 135.751,54.434 136.211,53.975 S4.4
  Bottom Layer w0.254: v1(133.25,50.885) 133.25,31.525 v1(136.5,28.275)
NetR14_1: R14.1 U4.2 VR1.1 | length 19.9
  Top Layer w0.254: U4.2 144.5,85 146.188,85 147.488,83.7 ; VR1.1 147.488,83.7 ; R14.1 147.488,83.7
NetR15_1: R15.1 S6.4 U3.13 | length 90.1
  Top Layer w0.254: S6.4 R15.1 54.344,11.035 57.097,8.282 114.347,8.282 116.75,10.685 116.75,16.611 119.044,18.904 119.445,18.904 125.3,24.759 U3.13
NetR16_1: R16.1 S7.4 U3.19 | length 64.9
  Top Layer w0.254: S7.4 R16.1 ; U3.19 130.1,25.444 131.175,24.369 v1(131.175,22.01)
  Bottom Layer w0.254: S7.4 96.965,11.035 100.25,7.75 128.726,7.75 128.875,7.899 128.875,19.71 v1(131.175,22.01)
NetR17_1: R17.1 S8.4 U3.20 | length 21.4
  Top Layer w0.254: U3.20 130.9,25.5 132.775,23.625 v1(132.775,21.833) ; S8.4 R17.1
  Bottom Layer w0.254: S8.4 129.752,12.249 129.752,18.81 v1(132.775,21.833)
NetU1_5: U1.5 U1.8 | length 5.6
  Top Layer w0.254: U1.5 105.295,86.087 103.607,86.087 103.458,86.236 103.458,87.926 103.607,88.075 U1.8
PGEC2: J2.5 U3.9 | length 21.2
  Top Layer w0.254: J2.5 121.36,22.898 121.36,29.673 121.562,29.875 U3.9
PGED2: J2.4 U3.8 | length 19.4
  Top Layer w0.254: J2.4 120.75,24.828 120.75,29.634 121.791,30.675 U3.8
Reset: U3.42 X2.12 X3.5 | length 79.1
  Top Layer w0.254: X2.12 117.471,50.355 v4(122.276,45.55) ; v4(125.491,44.555) 125.491,40.626 125.405,40.541 125.405,40.33 126.1,39.635 U3.42
  Bottom Layer w0.254: X3.5 87.826,76.87 X2.12 ; v4(122.276,45.55) 123.271,44.555 v4(125.491,44.555)
Reset_uc: C4.2 J2.1 R6.2 R11.2 U3.18 | length 44
  Top Layer w0.254: C4.2 104.35,22.15 105.9,23.7 R6.2 107.998,23.948 J2.1 ; v4(126.375,20.806) 133.306,20.806 133.61,21.11 133.852,21.11 R11.2 134.15,22.476 v4(135.75,24.076) ; U3.18 129.3,25.056 130.089,24.267 v4(130.375,24.267)
  Bottom Layer w0.254: J2.1 118.713,23.948 121.855,20.806 v4(126.375,20.806) ; v4(130.375,24.267) 135.56,24.267 v4(135.75,24.076)
SCLK: U3.14 X2.17 | length 26.2
  Top Layer w0.254: v1(124.775,22.476) 124.775,23.663 126.1,24.988 U3.14
  Bottom Layer w0.254: X2.17 116.475,35.521 116.475,27.436 121.434,22.476 v1(124.775,22.476)
U_D_N: J1.2 R3.1 | length 6.1
  Top Layer w0.381: R3.1 104.274,95.542 104.274,96.581 103.929,96.926 103.929,97.74 104.89,98.702 104.89,100.84 J1.2
U_D_P: J1.3 R4.1 | length 5.7
  Top Layer w0.381: R4.1 101.183,97.725 101.948,98.491 103.449,98.491 103.46,98.479 103.776,98.479 104.259,98.963 104.259,100.841 J1.3
USB_CTS: U1.24 U3.2 | length 68.7
  Top Layer w0.254: U1.24 99.825,86.125 104.775,81.175 114.62,81.175 v1(117.5,78.295) ; v1(117.512,38.45) 118.896,38.45 121.871,35.475 U3.2
  Bottom Layer w0.254: v1(117.5,78.295) 117.506,78.289 117.506,38.456 v1(117.512,38.45)
USB_D_N: R3.2 U1.15 | length 7.1
  Top Layer w0.381: U1.15 101.344,91.975 101.567,92.198 101.567,92.868 103.06,94.361 103.06,94.676 102.991,94.745 102.991,95.125 R3.2
USB_D_P: R4.2 U1.14 | length 9.5
  Top Layer w0.381: R4.2 103.117,97.266 103.117,96.555 103.691,95.981 103.691,94.099 102.198,92.606 102.198,92.198 102.422,91.975 U1.14
USB_RTS: U1.21 U3.3 | length 73.3
  Top Layer w0.254: U1.21 99.842,88.075 102.578,85.339 102.578,84.536 105.114,82 v1(117.506,82) ; v1(118.114,36.469) 119.806,36.469 121.6,34.675 U3.3
  Bottom Layer w0.254: v1(117.506,82) 118.114,81.392 v1(118.114,36.469)
USB_RX: TP1.1 U1.4 U3.4 | length 73
  Top Layer w0.254: U1.4 115.15,85.475 118.751,81.874 v1(118.751,79.5) ; v1(118.751,35.669) 119.906,35.669 121.7,33.875 U3.4
  Bottom Layer w0.254: v1(118.751,35.669) v1(118.751,79.5) 119.249,79.5 122.361,76.388 123.249,75.5 TP1.1
USB_TX: TP2.1 U1.23 U3.5 | length 77
  Top Layer w0.254: U1.23 99.746,86.775 104.942,81.579 115.446,81.579 119.353,77.672 v1(119.353,76.515) ; v1(119.387,34.15) 120.281,34.15 121.356,33.075 U3.5
  Bottom Layer w0.254: v1(119.353,76.515) 119.353,70.086 ; v1(119.387,34.15) 119.353,34.184 119.353,70.086 ; TP2.1 119.353,70.086
VBUS: FB1.1 J1.1 R1.1 | length 13.7
  Top Layer w0.5: J1.1@105.575,100.45 110.725,95.3 110.725,92.125 FB1.1 110.9,92.1 112.675,90.325 112.675,90.075 R1.1
Xbee_RX: TP3.1 U3.26 X3.2 | length 120.7
  Top Layer w0.254: X3.2 86.75,62.87 99,50.62 99,27.571 99.421,27.15 v1(118.751,27.15) ; U3.26 135.805,30.675 136.8,29.681 140,29.681 v1(140.8,28.881)
  Bottom Layer w0.254: v1(118.751,27.15) 138.15,27.15 139.881,28.881 v1(140.8,28.881) TP3.1
Xbee_TX: TP4.1 U3.25 X3.3 | length 114.9
  Top Layer w0.254: X3.3 98.25,49.37 98.25,27.75 99.75,26.25 v1(118.751,26.25) ; U3.25 136.034,29.875 137.169,28.74 v1@137.169,26.1
  Bottom Layer w0.254: v1(118.751,26.25) 118.826,26.175 137.094,26.175 v1@137.169,26.1 ; v1(137.469,26.1) TP4.1@140.484,26.1
pads on no net: J1. J1.4 J2.6 MP1.1 MP2.1 MP3.1 MP4.1 S1.2 S1.3 S2.2 S2.3 S3.2 S3.3 S4.2 S4.3 S5.2 S5.3 S6.2 S6.3 S7.2 S7.3 S8.2 S8.3 U1.2 U1.3 U1.6 U1.9 U1.10 U1.11 U1.12 U1.17 U1.18 U1.19 U1.20 U1.25 U1.26 U1.27 U2.1 U2.6 U2.8 U2.9 U2.16 U3.1 U3.38 X1.1 X1.2 X1.3 X1.4 X1.5 X1.6 X1.7 X1.8 X1.9 X1.10 X1.11 X1.12 X1.13 X1.14 X1.15 X1.16 X1.17 X1.18 X2.1 X2.2 X2.3 X2.4 X2.5 X2.6 X2.7 X2.8 X2.9 X2.10 X2.18 X3.4 X3.6 X3.7 X3.8 X3.9 X3.11 X3.12 X3.13 X3.14 X3.15 X3.17 X3.19 X3.20

## Polygon pours and split planes (outlines as drawn)
GND on Bottom Layer "GND_L02_P000" (solid, pour order 0): 8.5,0 158.5,0 158.5,19.5 167,19.5 167,87 158.5,87 158.5,106.5 87.5,106.5 87.5,86.25 8.75,86.25 8.75,87 0,87 0,19.5 8.5,19.5
GND on Top Layer "GND_L01_P001" (solid, pour order 1): 8.541,0.066 158.541,0.066 158.541,19.566 167.041,19.566 167.041,87.066 158.541,87.066 158.541,106.566 87.541,106.566 87.541,86.316 8.791,86.316 8.791,87.066 0.041,87.066 0.041,19.566 8.541,19.566

## Silkscreen, mask and mechanical layers (free items; w line width, h text height)
Top Overlay:
  drawing of 12 lines, arcs and shapes, not listed
  text "LED_Alim" at 122.367,100.408 h1.52
  text "Buzzer" at 147.595,87.649 h1.52
  text "LED_Receive" at 116.354,86.047 h1.52
  text "Btn_UP" at 121.754,71.933 h1.52
  text "Btn_OK" at 149.754,59.758 h1.52
  text "Btn_ESC" at 116.754,53.758 h1.52
  text "Btn_DOWN" at 138.395,49.508 h1.52
  text "18111C_Ticketing_Master" at 2.75,38.5 h1.52
  text "Btn_Reset" at 136.004,6.508 h1.52
  text "Btn_Accept" at 34.754,4.012 h1.52
  text "Btn_Decline" at 74.504,3.758 h1.52
  text "Btn_Reset_Tickets" at 113.07,3.758 h1.52
Bottom Overlay:
  drawing of 12 lines, arcs and shapes, not listed
  text "3V3" at 135.496,103.324 h1.52
  text "5V" at 128.246,103.254 h1.52
  text "GND" at 142.246,102.794 h1.52
  text "GND" at 94.496,95.638 h1.52
  text "USB_RX" at 129.246,77.758 h1.52
  text "USB_TX" at 128.746,72.067 h1.52
  text "GND" at 156.246,45.004 h1.52
  text "18111C_Ticketing_Master" at 34.951,38.405 h1.52
  text "Xbee_RX" at 142.246,33.008 h1.52
  text "Xbee_TX" at 144.246,21.916 h1.52
  text "GND" at 65.746,6.004 h1.52
Board Outline (ES):
  lines w0.254: 167.025,19.525 167,19.5 ; 167,19.5 167,87 158.5,87 158.5,106.5 8.5,106.5 8.5,87 0,87 0,19.5 8.5,19.5 8.5,0 158.5,0 158.5,19.5 167,19.5

## Dimensions
167,87 to 167,19.5 on Top Dims
167,19.5 to 158.5,0 on Top Dims
158.5,106.5 to 158.5,0 on Top Dims
0,87 to 167,87 on Top Dims
8.5,106.5 to 0,87 on Top Dims
8.5,106.5 to 158.5,106.5 on Top Dims

## Text inside footprints (layer, text, board x,y; h text height)
D2: Top Overlay "K" at 126.44,79.197 h0.76 r270; Components Courtyards "K" at 126.44,79.197 h0.76 r270
J1: Components Courtyards "PCB Edge" at 106.15,106.15 h1 r180